# Altium PCB uADC_PCBPcbDoc.PcbDoc (part 2 of 2)
Units mm, origin at the board's own origin, x right, y up, seen from the top; angles counter-clockwise.
Board outline 125 x 63 mm, 4 copper layers (Top Layer, Layer 1, Layer 2, Bottom Layer), stack 2.084 mm thick; 242 components, 92 nets, 541 pads, 139 vias.
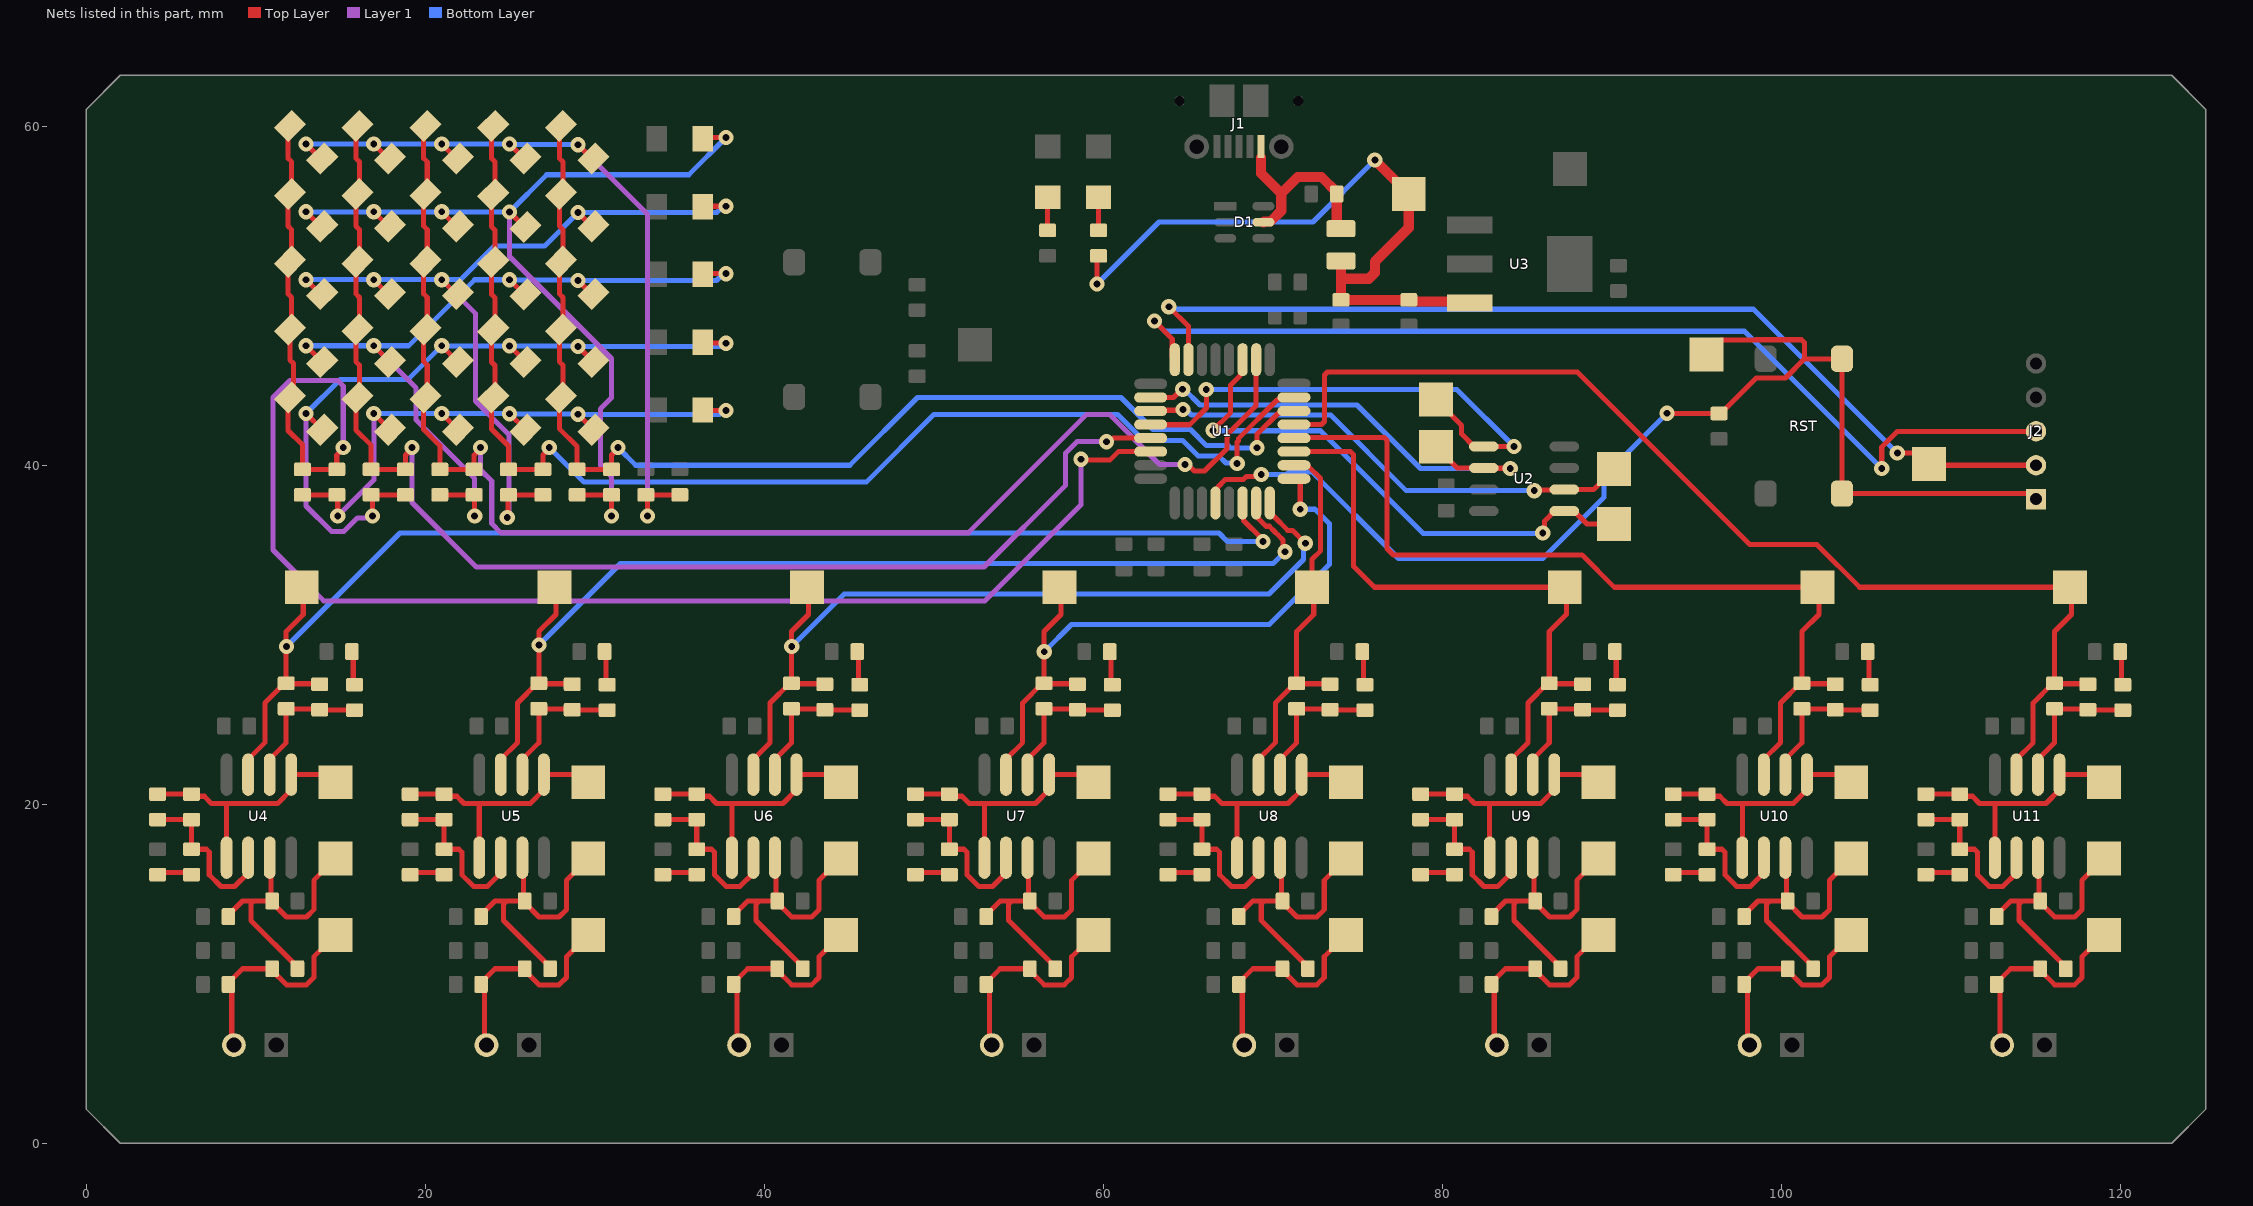
[diagram p4: the nets of this part, all layers, seen from the top]

## Via types
v1: diameter 0.9, hole 0.4, Top Layer to Bottom Layer, tented both sides, 110 vias
v2: diameter 0.6/0.6/0.6/0.6 (per signal layer), hole 0.4, Top Layer to Bottom Layer, 24 vias
v3: diameter 6, hole 3.2, Top Layer to Bottom Layer, 4 vias
v4: diameter 0.9, hole 0.4, Top Layer to Bottom Layer, 1 vias

## Nets (pads, with @x,y where several pads share a name; then routed paths per layer and width w, separated by ;. In a path a pad name is that pad's centre, name@x,y a point inside that pad or via, vN(x,y) a via of type N, cw(c..) or ccw(c..) an arc to the next point about the centre after c; other vN are vias at no path point) (continued)
LD_1: C74.2 D24.2 D25.2 D26.2 D27.2 D28.2 R64.1 U1.14 | length 69
  Top Layer w0.3: D25.2@28,48 27.894,47.894 27.894,46.106 28.106,45.894 28.106,44.106 D24.2@28,44 27.894,43.894 27.894,42.156 28.949,41.101 R64.1@28.949,39.75 C74.2@30.974,39.75 30.974,40.597 v1@31.356,40.978 ; D26.2@28,52 27.894,51.894 27.894,50.106 28.106,49.894 D25.2@28.106,48.106 ; D27.2@28,56 27.894,55.894 27.894,54.106 28.106,53.894 D26.2@28.106,52.106 ; D28.2@28,60 27.894,59.894 27.894,58.106 28.106,57.894 D27.2@28.106,56.106 ; v1(69.05,41.025) 69.054,41.029 69.054,41.824 70.281,43.05 70.319,43.05 70.469,43.2 U1.14@71.225,43.2
  Bottom Layer w0.3: v1(31.356,41.05) 32.406,40 45.025,40 49.025,44 61.025,44 62.919,42.106 65.122,42.106 66.074,41.155 67.359,41.155 67.488,41.025 v1(69.05,41.025)
LD_2: C73.2 D19.2 D20.2 D21.2 D22.2 D23.2 R63.1 U1.15 | length 74.3
  Top Layer w0.3: D19.2@24,44 23.894,43.894 23.894,42.13 24.897,41.127 R63.1@24.897,39.75 C73.2@26.923,39.75 26.923,40.597 v1@27.304,40.978 ; D20.2@24,47.989 23.894,47.883 23.894,46.095 24.106,45.883 D19.2@24.106,44.095 ; D21.2@24,51.977 23.894,51.871 23.894,50.083 24.106,49.871 D20.2@24.106,48.083 ; D22.2@24,55.966 23.894,55.86 23.894,54.072 24.106,53.86 D21.2@24.106,52.072 ; D23.2@24,60 23.894,59.894 23.894,58.106 24.106,57.894 D22.2@24.106,56.106 ; v1(67.875,40.1) 67.875,41.361 67.947,41.433 67.947,41.565 70.232,43.85 70.319,43.85 70.469,44 U1.15@71.225,44
  Bottom Layer w0.3: v1(27.304,41.05) 29.354,39 46,39 50,43 60.825,43 62.357,41.468 64.648,41.468 65.562,40.555 66.795,40.555 67.226,40.123 67.852,40.123 v1(67.875,40.1)
LD_3: C72.2 D14.2 D15.2 D16.2 D17.2 D18.2 R62.1 U1.18 | length 83.8
  Top Layer w0.3: D14.2@20,44 19.894,43.894 19.894,42.105 20.846,41.153 R62.1@20.846,39.75 ; D15.2@20,48 19.894,47.894 19.894,46.106 20.106,45.894 D14.2@20.106,44.106 ; D16.2@20,52 19.894,51.894 19.894,50.106 20.106,49.894 D15.2@20.106,48.106 ; D17.2@20,56 19.894,55.894 19.894,54.106 20.106,53.894 D16.2@20.106,52.106 ; D18.2@20,60 19.894,59.894 19.894,58.106 20.106,57.894 D17.2@20.106,56.106 ; R62.1@20.505,40 20.755,39.75 R62.1@20.846,39.75 ; v1@23.253,40.978 22.872,40.597 C72.2@22.872,39.75 R62.1@20.846,39.75 ; v1(64.804,40.039) 64.967,40.039 65.351,39.655 65.955,39.655 67.275,40.975 67.275,41.61 67.347,41.682 67.347,41.874 69,43.528 U1.18@69,46.225
  Layer 1 w0.3: v1(23.253,41.05) 23.253,39.717 23.907,39.063 23.907,36.556 24.447,36.016 52.016,36.016 59,43 60.341,43 63.302,40.039 v1(64.804,40.039)
LD_4: C71.2 D9.2 D10.2 D11.2 D12.2 D13.2 R61.1 U1.29 | length 77.2
  Top Layer w0.3: D9.2@16,44 15.894,43.894 15.894,42.079 16.794,41.179 R61.1@16.794,39.75 ; D10.2@16,48 15.894,47.894 15.894,46.106 16.106,45.894 D9.2@16.106,44.106 ; D11.2@16,52 15.894,51.894 15.894,50.106 16.106,49.894 D10.2@16.106,48.106 ; D12.2@16,56 15.894,55.894 15.894,54.106 16.106,53.894 D11.2@16.106,52.106 ; D13.2@16,60 15.894,59.894 15.894,58.106 16.106,57.894 D12.2@16.106,56.106 ; R61.1@16.505,40 16.755,39.75 R61.1@16.794,39.75 ; v1@19.201,40.978 18.82,40.597 C71.2@18.82,39.75 R61.1@16.794,39.75 ; v1(60.17,41.388) 60.332,41.388 60.544,41.6 U1.29@62.775,41.6
  Layer 1 w0.3: v1(19.201,41.05) 19.201,37.799 23,34 52.945,34 57.763,38.818 57.763,40.725 58.43,41.391 60.167,41.391 v1(60.17,41.388)
LD_5: C70.2 D4.2 D5.2 D6.2 D7.2 D8.2 R60.1 U1.30 | length 99.8
  Top Layer w0.3: D4.2@12,44 11.894,43.894 11.894,42.053 12.743,41.204 R60.1@12.743,39.75 C70.2@14.769,39.75 14.769,40.597 15.15,40.978 v1(15.15,41.05) ; D6.2@12,52 11.894,51.894 11.894,50.106 12.106,49.894 12.106,48.106 D5.2@12,48 12,46.212 12.212,46 D4.2@12.212,44.212 ; D7.2@12,56 11.894,55.894 11.894,54.106 12.106,53.894 D6.2@12.106,52.106 ; D8.2@12,60 11.894,59.894 11.894,58.106 12.106,57.894 D7.2@12.106,56.106 ; v1(58.663,40.352) 58.717,40.298 60.367,40.298 60.869,40.8 U1.30@62.775,40.8
  Layer 1 w0.3: v1(15.15,41.05) 15.15,44.674 14.824,45 12,45 11,44 11,35 14,32 53,32 58.663,37.663 v1(58.663,40.352)
MEM_CS: CS.1 U1.19 U2.1 | length 32.3
  Top Layer w0.3: v1(66.447,42.055) 67.493,43.101 67.493,44.724 68.05,45.281 68.05,45.319 68.2,45.469 U1.19@68.2,46.225 ; v1(85.9,36) 86.015,36.115 86.015,36.71 86.6,37.295 U2.1@87.175,37.295 87.75,37.295 88.51,36.535 CS.1@90.1,36.535
  Bottom Layer w0.3: v1(66.447,42.055) 66.469,42.033 72.792,42.033 78.853,35.973 85.873,35.973 v1(85.9,36)
MIC0: C18.1 R7.1 TP13.1@12.7,32.8 U1.6 U4.7 | length 77.6
  Top Layer w0.3: U4.7@9.543,21.75 9.543,22.65 10.527,23.635 10.527,25.979 11.685,27.137 C18.1@11.785,27.137 ; TP13.1@12.7,32.8 12.793,32.707 12.793,31.193 11.785,30.186 C18.1@11.785,27.137 ; R7.1@13.756,27.083 13.729,27.11 11.812,27.11 C18.1@11.785,27.137 ; U1.6@68.2,37.775 68.257,37.718 68.257,36.743 v1@69.3,35.7
  Bottom Layer w0.3: v1(11.8,29.3) 18.5,36 66.8,36 67.3,35.5 v1(69.4,35.5)
MIC1: C25.1 R14.1 TP17.1 U1.7 U5.7 | length 64.5
  Top Layer w0.3: U5.7@24.443,21.75 24.443,22.65 25.427,23.635 25.427,25.979 26.585,27.137 C25.1@26.685,27.137 ; TP17.1@27.6,32.8 27.693,32.707 27.693,31.193 26.685,30.186 C25.1@26.685,27.137 ; R14.1@28.656,27.083 28.629,27.11 26.712,27.11 C25.1@26.685,27.137 ; U1.7@69,37.775 69,37.019 69.15,36.869 69.15,36.831 69.581,36.4 69.773,36.4 70.086,36.086 70.3,35.873 70.585,35.588 70.585,35.015 v1(70.7,34.9)
  Bottom Layer w0.3: v1(26.7,29.4) 31.5,34.2 70,34.2 v1(70.7,34.9)
MIC2: C32.1 R21.1 TP21.1 U1.8 U6.7 | length 51.2
  Top Layer w0.3: U6.7@39.343,21.75 39.343,22.65 40.327,23.635 40.327,25.979 41.485,27.137 C32.1@41.585,27.137 ; TP21.1@42.5,32.8 42.593,32.707 42.593,31.193 41.585,30.186 C32.1@41.585,27.137 ; R21.1@43.556,27.083 43.529,27.11 41.612,27.11 C32.1@41.585,27.137 ; U1.8@69.8,37.775 69.8,37.181 69.981,37 70.021,37 70.861,36.161 71.139,36.161 v1(71.9,35.4)
  Bottom Layer w0.3: v1(41.6,29.3) 44.7,32.4 69.751,32.4 71.785,34.434 71.785,35.285 v1(71.9,35.4)
MIC3: C39.1 R28.1 TP25.1 U1.9 U7.7 | length 40
  Top Layer w0.3: U7.7@54.243,21.75 54.243,22.65 55.227,23.635 55.227,25.979 56.385,27.137 C39.1@56.485,27.137 ; TP25.1@57.4,32.8 57.493,32.707 57.493,31.193 56.485,30.186 C39.1@56.485,27.137 ; R28.1@58.456,27.083 58.429,27.11 56.512,27.11 C39.1@56.485,27.137 ; U1.9@71.225,39.2 71.461,39.2 71.6,39.061 v1(71.6,37.4)
  Bottom Layer w0.3: v1(56.5,29) 58.1,30.6 69.768,30.6 73.32,34.151 73.32,36.546 72.466,37.4 v1(71.6,37.4)
MIC4: C46.1 R35.1 TP29.1 U1.10 U8.7 | length 23
  Top Layer w0.3: U8.7@69.143,21.75 69.143,22.65 70.127,23.635 70.127,25.979 71.285,27.137 C46.1@71.385,27.137 ; U1.10@71.225,40 71.282,39.943 72.077,39.943 72.8,39.219 72.8,34.961 72.3,34.461 TP29.1@72.3,32.8 72.393,32.707 72.393,31.193 71.385,30.186 C46.1@71.385,27.137 ; R35.1@73.356,27.083 73.329,27.11 71.412,27.11 C46.1@71.385,27.137
MIC5: C53.1 R42.1 TP33.1 U1.11 U9.7 | length 37.6
  Top Layer w0.3: U1.11@71.225,40.8 74.566,40.8 74.741,40.624 74.741,34.034 75.976,32.8 TP33.1@87.2,32.8 87.293,32.707 87.293,31.193 86.285,30.186 C53.1@86.285,27.137 ; U9.7@84.042,21.75 84.042,22.65 85.027,23.635 85.027,25.979 86.185,27.137 C53.1@86.285,27.137 ; R42.1@88.256,27.083 88.229,27.11 86.312,27.11 C53.1@86.285,27.137
MIC6: C60.1 R49.1 TP37.1 U1.12 U10.7 | length 52.8
  Top Layer w0.3: U1.12@71.225,41.6 71.267,41.642 76.541,41.642 76.717,41.466 76.717,35.083 77.1,34.7 88.225,34.7 90.125,32.8 TP37.1@102.1,32.8 102.193,32.707 102.193,31.193 101.185,30.186 C60.1@101.185,27.137 ; U10.7@98.942,21.75 98.942,22.65 99.927,23.635 99.927,25.979 101.085,27.137 C60.1@101.185,27.137 ; R49.1@103.156,27.083 103.129,27.11 101.212,27.11 C60.1@101.185,27.137
MIC7: C67.1 R56.1 TP41.1 U1.13 U11.7 | length 68.4
  Top Layer w0.3: U1.13@71.225,42.4 72.854,42.4 73.03,42.576 73.03,45.324 73.206,45.5 87.938,45.5 98.126,35.312 102.083,35.312 104.595,32.8 TP41.1@117,32.8 117.093,32.707 117.093,31.193 116.085,30.186 C67.1@116.085,27.137 ; U11.7@113.842,21.75 113.842,22.65 114.827,23.635 114.827,25.979 115.985,27.137 C67.1@116.085,27.137 ; R56.1@118.056,27.083 118.029,27.11 116.112,27.11 C67.1@116.085,27.137
MISO: MISO.1 U1.27 U2.2 | length 29.9
  Top Layer w0.3: U1.27@62.775,43.2 62.818,43.243 64.644,43.243 v1(64.686,43.285) ; v1(85.4,38.5) 85.432,38.532 87.143,38.532 U2.2@87.175,38.565 87.182,38.572 88.904,38.572 MISO.1@90.1,39.768
  Bottom Layer w0.3: v1(64.686,43.285) 64.849,43.285 65.179,42.955 73.395,42.955 77.85,38.5 v1(85.4,38.5)
MOSI: MOSI.1 U1.28 U2.5 | length 30.4
  Top Layer w0.3: U1.28@62.79,42.385 65.076,42.385 66.071,43.38 v1@66.071,44.446 ; MOSI.1@79.6,43.87 81.121,42.349 81.121,41.834 81.85,41.105 U2.5@82.425,41.105 82.427,41.102 84.197,41.102 v1(84.2,41.1)
  Bottom Layer w0.3: v1(66.051,44.467) 80.833,44.467 v1(84.2,41.1)
Net3_3V_2: 3_3V.2 R2.1 | length 1.9
  Top Layer w0.3: R2.1@56.7,53.85 3_3V.2@56.7,55.8
Net_1: C17.1 R5.1 TP13.1@14.7,21.3 U4.1 U4.5 | length 15.4
  Top Layer w0.3: R5.1@4.2,20.6 C17.1@6.2,20.6 6.329,20.471 6.949,20.471 7.371,20.05 8.222,20.05 ; U4.1@8.273,16.85 8.273,20 8.222,20.05 ; TP13.1@14.7,21.3 14.25,21.75 U4.5@12.083,21.75 12.083,20.85 11.282,20.05 8.222,20.05
NetC14_1: C14.1 R6.2 | length 2
  Top Layer w0.3: C14.1@15.662,29 15.739,28.923 15.739,27.13 R6.2@15.816,27.053
NetC15_1: C15.1 R4.2 | length 2.1
  Top Layer w0.3: C15.1@4.2,15.85 4.325,15.975 6.075,15.975 R4.2@6.2,16.1
NetC17_2: C17.2 R4.1 R5.2 U4.2 | length 9.9
  Top Layer w0.3: R5.2@4.2,19.1 C17.2@6.2,19.1 6.2,17.6 R4.1@6.3,17.6 ; R4.1@6.2,17.35 7.07,17.35 7.246,17.174 7.246,15.846 7.941,15.15 8.743,15.15 9.543,15.95 U4.2@9.543,16.85
NetC18_2: C18.2 R6.1 R7.2 U4.6 | length 8.4
  Top Layer w0.3: U4.6@10.813,21.75 10.813,22.65 11.785,23.623 C18.2@11.785,25.637 11.812,25.61 13.729,25.61 R7.2@13.756,25.583 13.771,25.568 15.801,25.568 R6.1@15.816,25.553
NetC19_1: C19.1 R9.1 R10.2 TP11.1 U4.3 | length 17.5
  Top Layer w0.3: R9.1@8.378,13.375 8.378,13.475 9.203,14.3 9.876,14.3 ; U4.3@10.813,16.85 10.881,16.781 10.881,14.369 R10.2@10.95,14.3 ; C19.1@12.45,10.3 12.45,10.4 9.7,13.15 9.7,14.124 9.876,14.3 ; TP11.1@14.7,16.8 13.414,15.514 13.414,13.786 12.978,13.35 11.8,13.35 10.95,14.2 R10.2@10.95,14.3 ; 9.876,14.3 R10.2@10.95,14.3
NetC19_2: C19.2 CH0.2 R8.1 TP10.1 | length 13
  Top Layer w0.3: TP10.1@14.7,12.3 13.414,11.014 13.414,9.786 12.978,9.35 11.8,9.35 10.95,10.2 C19.2@10.95,10.3 9.203,10.3 8.378,9.475 R8.1@8.378,9.375 8.575,9.177 CH0.2@8.575,5.925 ; CH0.2@8.575,5.925 CH0.2@8.7,5.8 CH0.2@8.575,5.925
NetC21_1: C21.1 R13.2 | length 2
  Top Layer w0.3: C21.1@30.562,29 30.639,28.923 30.639,27.13 R13.2@30.716,27.053
NetC22_1: C22.1 R11.2 | length 2.1
  Top Layer w0.3: C22.1@19.1,15.85 19.225,15.975 20.975,15.975 R11.2@21.1,16.1
NetC24_1: C24.1 R12.1 TP16.1 U5.1 U5.5 | length 15.4
  Top Layer w0.3: R12.1@19.1,20.6 C24.1@21.1,20.6 21.229,20.471 21.849,20.471 22.271,20.05 23.122,20.05 ; U5.1@23.173,16.85 23.173,20 23.122,20.05 ; TP16.1@29.6,21.3 29.15,21.75 U5.5@26.983,21.75 26.983,20.85 26.182,20.05 23.122,20.05
NetC24_2: C24.2 R11.1 R12.2 U5.2 | length 9.9
  Top Layer w0.3: R12.2@19.1,19.1 C24.2@21.1,19.1 21.1,17.6 R11.1@21.2,17.6 ; R11.1@21.1,17.35 21.97,17.35 22.146,17.174 22.146,15.846 22.841,15.15 23.643,15.15 24.443,15.95 U5.2@24.443,16.85
NetC25_2: C25.2 R13.1 R14.2 U5.6 | length 8.4
  Top Layer w0.3: U5.6@25.713,21.75 25.713,22.65 26.685,23.623 C25.2@26.685,25.637 26.712,25.61 28.629,25.61 R14.2@28.656,25.583 28.671,25.568 30.701,25.568 R13.1@30.716,25.553
NetC26_1: C26.1 R16.1 R17.2 TP15.1 U5.3 | length 17.5
  Top Layer w0.3: R16.1@23.278,13.375 23.278,13.475 24.103,14.3 24.776,14.3 ; U5.3@25.713,16.85 25.781,16.781 25.781,14.369 R17.2@25.85,14.3 ; C26.1@27.35,10.3 27.35,10.4 24.6,13.15 24.6,14.124 24.776,14.3 ; TP15.1@29.6,16.8 28.314,15.514 28.314,13.786 27.878,13.35 26.7,13.35 25.85,14.2 R17.2@25.85,14.3 ; 24.776,14.3 R17.2@25.85,14.3
NetC26_2: C26.2 CH1.2 R15.1 TP14.1 | length 13
  Top Layer w0.3: TP14.1@29.6,12.3 28.314,11.014 28.314,9.786 27.878,9.35 26.7,9.35 25.85,10.2 C26.2@25.85,10.3 24.103,10.3 23.278,9.475 R15.1@23.278,9.375 23.475,9.177 CH1.2@23.475,5.925 ; CH1.2@23.475,5.925 CH1.2@23.6,5.8 CH1.2@23.475,5.925
NetC28_1: C28.1 R20.2 | length 2
  Top Layer w0.3: C28.1@45.462,29 45.539,28.923 45.539,27.13 R20.2@45.616,27.053
NetC29_1: C29.1 R18.2 | length 2.1
  Top Layer w0.3: C29.1@34,15.85 34.125,15.975 35.875,15.975 R18.2@36,16.1
NetC31_1: C31.1 R19.1 TP20.1 U6.1 U6.5 | length 15.4
  Top Layer w0.3: R19.1@34,20.6 C31.1@36,20.6 36.129,20.471 36.749,20.471 37.171,20.05 38.022,20.05 ; U6.1@38.073,16.85 38.073,20 38.022,20.05 ; TP20.1@44.5,21.3 44.05,21.75 U6.5@41.883,21.75 41.883,20.85 41.082,20.05 38.022,20.05
NetC31_2: C31.2 R18.1 R19.2 U6.2 | length 9.9
  Top Layer w0.3: R19.2@34,19.1 C31.2@36,19.1 36,17.6 R18.1@36.1,17.6 ; R18.1@36,17.35 36.87,17.35 37.046,17.174 37.046,15.846 37.741,15.15 38.543,15.15 39.343,15.95 U6.2@39.343,16.85
NetC32_2: C32.2 R20.1 R21.2 U6.6 | length 8.4
  Top Layer w0.3: U6.6@40.613,21.75 40.613,22.65 41.585,23.623 C32.2@41.585,25.637 41.612,25.61 43.529,25.61 R21.2@43.556,25.583 43.571,25.568 45.601,25.568 R20.1@45.616,25.553
NetC33_1: C33.1 R23.1 R24.2 TP19.1 U6.3 | length 17.5
  Top Layer w0.3: R23.1@38.178,13.375 38.178,13.475 39.003,14.3 39.676,14.3 ; U6.3@40.613,16.85 40.681,16.781 40.681,14.369 R24.2@40.75,14.3 ; C33.1@42.25,10.3 42.25,10.4 39.5,13.15 39.5,14.124 39.676,14.3 ; TP19.1@44.5,16.8 43.214,15.514 43.214,13.786 42.778,13.35 41.6,13.35 40.75,14.2 R24.2@40.75,14.3 ; 39.676,14.3 R24.2@40.75,14.3
NetC33_2: C33.2 CH2.2 R22.1 TP18.1 | length 13
  Top Layer w0.3: TP18.1@44.5,12.3 43.214,11.014 43.214,9.786 42.778,9.35 41.6,9.35 40.75,10.2 C33.2@40.75,10.3 39.003,10.3 38.178,9.475 R22.1@38.178,9.375 38.375,9.177 CH2.2@38.375,5.925 ; CH2.2@38.375,5.925 CH2.2@38.5,5.8 CH2.2@38.375,5.925
NetC35_1: C35.1 R27.2 | length 2
  Top Layer w0.3: C35.1@60.362,29 60.439,28.923 60.439,27.13 R27.2@60.516,27.053
NetC36_1: C36.1 R25.2 | length 2.1
  Top Layer w0.3: C36.1@48.9,15.85 49.025,15.975 50.775,15.975 R25.2@50.9,16.1
NetC38_1: C38.1 R26.1 TP24.1 U7.1 U7.5 | length 15.4
  Top Layer w0.3: R26.1@48.9,20.6 C38.1@50.9,20.6 51.029,20.471 51.649,20.471 52.071,20.05 52.922,20.05 ; U7.1@52.973,16.85 52.973,20 52.922,20.05 ; TP24.1@59.4,21.3 58.95,21.75 U7.5@56.783,21.75 56.783,20.85 55.982,20.05 52.922,20.05
NetC38_2: C38.2 R25.1 R26.2 U7.2 | length 9.9
  Top Layer w0.3: R26.2@48.9,19.1 C38.2@50.9,19.1 50.9,17.6 R25.1@51,17.6 ; R25.1@50.9,17.35 51.77,17.35 51.946,17.174 51.946,15.846 52.641,15.15 53.443,15.15 54.243,15.95 U7.2@54.243,16.85
NetC39_2: C39.2 R27.1 R28.2 U7.6 | length 8.4
  Top Layer w0.3: U7.6@55.513,21.75 55.513,22.65 56.485,23.623 C39.2@56.485,25.637 56.512,25.61 58.429,25.61 R28.2@58.456,25.583 58.471,25.568 60.501,25.568 R27.1@60.516,25.553
NetC40_1: C40.1 R30.1 R31.2 TP23.1 U7.3 | length 17.5
  Top Layer w0.3: R30.1@53.078,13.375 53.078,13.475 53.903,14.3 54.576,14.3 ; U7.3@55.513,16.85 55.581,16.781 55.581,14.369 R31.2@55.65,14.3 ; C40.1@57.15,10.3 57.15,10.4 54.4,13.15 54.4,14.124 54.576,14.3 ; TP23.1@59.4,16.8 58.114,15.514 58.114,13.786 57.678,13.35 56.5,13.35 55.65,14.2 R31.2@55.65,14.3 ; 54.576,14.3 R31.2@55.65,14.3
NetC40_2: C40.2 CH3.2 R29.1 TP22.1 | length 13
  Top Layer w0.3: TP22.1@59.4,12.3 58.114,11.014 58.114,9.786 57.678,9.35 56.5,9.35 55.65,10.2 C40.2@55.65,10.3 53.903,10.3 53.078,9.475 R29.1@53.078,9.375 53.275,9.177 CH3.2@53.275,5.925 ; CH3.2@53.275,5.925 CH3.2@53.4,5.8 CH3.2@53.275,5.925
NetC42_1: C42.1 R34.2 | length 2
  Top Layer w0.3: C42.1@75.262,29 75.339,28.923 75.339,27.13 R34.2@75.416,27.053
NetC43_1: C43.1 R32.2 | length 2.1
  Top Layer w0.3: C43.1@63.8,15.85 63.925,15.975 65.675,15.975 R32.2@65.8,16.1
NetC45_1: C45.1 R33.1 TP28.1 U8.1 U8.5 | length 15.4
  Top Layer w0.3: R33.1@63.8,20.6 C45.1@65.8,20.6 65.929,20.471 66.549,20.471 66.971,20.05 67.822,20.05 ; U8.1@67.873,16.85 67.873,20 67.822,20.05 ; TP28.1@74.3,21.3 73.85,21.75 U8.5@71.683,21.75 71.683,20.85 70.882,20.05 67.822,20.05
NetC45_2: C45.2 R32.1 R33.2 U8.2 | length 9.9
  Top Layer w0.3: R33.2@63.8,19.1 C45.2@65.8,19.1 65.8,17.6 R32.1@65.9,17.6 ; R32.1@65.8,17.35 66.67,17.35 66.846,17.174 66.846,15.846 67.541,15.15 68.342,15.15 69.143,15.95 U8.2@69.143,16.85
NetC46_2: C46.2 R34.1 R35.2 U8.6 | length 8.4
  Top Layer w0.3: U8.6@70.413,21.75 70.413,22.65 71.385,23.623 C46.2@71.385,25.637 71.412,25.61 73.329,25.61 R35.2@73.356,25.583 73.371,25.568 75.401,25.568 R34.1@75.416,25.553
NetC47_1: C47.1 R37.1 R38.2 TP27.1 U8.3 | length 17.5
  Top Layer w0.3: R37.1@67.978,13.375 67.978,13.475 68.803,14.3 69.476,14.3 ; U8.3@70.413,16.85 70.481,16.781 70.481,14.369 R38.2@70.55,14.3 ; C47.1@72.05,10.3 72.05,10.4 69.3,13.15 69.3,14.124 69.476,14.3 ; TP27.1@74.3,16.8 73.014,15.514 73.014,13.786 72.578,13.35 71.4,13.35 70.55,14.2 R38.2@70.55,14.3 ; 69.476,14.3 R38.2@70.55,14.3
NetC47_2: C47.2 CH4.2 R36.1 TP26.1 | length 13
  Top Layer w0.3: TP26.1@74.3,12.3 73.014,11.014 73.014,9.786 72.578,9.35 71.4,9.35 70.55,10.2 C47.2@70.55,10.3 68.803,10.3 67.978,9.475 R36.1@67.978,9.375 68.175,9.177 CH4.2@68.175,5.925 ; CH4.2@68.175,5.925 CH4.2@68.3,5.8 CH4.2@68.175,5.925
NetC49_1: C49.1 R41.2 | length 2
  Top Layer w0.3: C49.1@90.162,29 90.239,28.923 90.239,27.13 R41.2@90.316,27.053
NetC50_1: C50.1 R39.2 | length 2.1
  Top Layer w0.3: C50.1@78.7,15.85 78.825,15.975 80.575,15.975 R39.2@80.7,16.1
NetC52_1: C52.1 R40.1 TP32.1 U9.1 U9.5 | length 15.4
  Top Layer w0.3: R40.1@78.7,20.6 C52.1@80.7,20.6 80.829,20.471 81.449,20.471 81.871,20.05 82.722,20.05 ; U9.1@82.772,16.85 82.772,20 82.722,20.05 ; TP32.1@89.2,21.3 88.75,21.75 U9.5@86.582,21.75 86.582,20.85 85.782,20.05 82.722,20.05
NetC52_2: C52.2 R39.1 R40.2 U9.2 | length 9.9
  Top Layer w0.3: R40.2@78.7,19.1 C52.2@80.7,19.1 80.7,17.6 R39.1@80.8,17.6 ; R39.1@80.7,17.35 81.57,17.35 81.746,17.174 81.746,15.846 82.441,15.15 83.242,15.15 84.042,15.95 U9.2@84.042,16.85
NetC53_2: C53.2 R41.1 R42.2 U9.6 | length 8.4
  Top Layer w0.3: U9.6@85.312,21.75 85.312,22.65 86.285,23.623 C53.2@86.285,25.637 86.312,25.61 88.229,25.61 R42.2@88.256,25.583 88.271,25.568 90.301,25.568 R41.1@90.316,25.553
NetC54_1: C54.1 R44.1 R45.2 TP31.1 U9.3 | length 17.5
  Top Layer w0.3: R44.1@82.878,13.375 82.878,13.475 83.703,14.3 84.376,14.3 ; U9.3@85.312,16.85 85.381,16.781 85.381,14.369 R45.2@85.45,14.3 ; C54.1@86.95,10.3 86.95,10.4 84.2,13.15 84.2,14.124 84.376,14.3 ; TP31.1@89.2,16.8 87.914,15.514 87.914,13.786 87.478,13.35 86.3,13.35 85.45,14.2 R45.2@85.45,14.3 ; 84.376,14.3 R45.2@85.45,14.3
NetC54_2: C54.2 CH5.2 R43.1 TP30.1 | length 13
  Top Layer w0.3: R43.1@82.878,9.475 83.703,10.3 C54.2@85.45,10.3 85.45,10.2 86.3,9.35 87.478,9.35 87.914,9.786 87.914,11.014 TP30.1@89.2,12.3 ; R43.1@83.075,9.177 R43.1@82.878,9.375 83.039,9.213 83.039,5.961 CH5.2@83.2,5.8
NetC56_1: C56.1 R48.2 | length 2
  Top Layer w0.3: C56.1@105.062,29 105.139,28.923 105.139,27.13 R48.2@105.216,27.053
NetC57_1: C57.1 R46.2 | length 2.1
  Top Layer w0.3: C57.1@93.6,15.85 93.725,15.975 95.475,15.975 R46.2@95.6,16.1
NetC59_1: C59.1 R47.1 TP36.1 U10.1 U10.5 | length 15.4
  Top Layer w0.3: R47.1@93.6,20.6 C59.1@95.6,20.6 95.729,20.471 96.349,20.471 96.771,20.05 97.622,20.05 ; U10.1@97.672,16.85 97.672,20 97.622,20.05 ; TP36.1@104.1,21.3 103.65,21.75 U10.5@101.482,21.75 101.482,20.85 100.682,20.05 97.622,20.05
NetC59_2: C59.2 R46.1 R47.2 U10.2 | length 9.9
  Top Layer w0.3: R47.2@93.6,19.1 C59.2@95.6,19.1 95.6,17.6 R46.1@95.7,17.6 ; R46.1@95.6,17.35 96.47,17.35 96.646,17.174 96.646,15.846 97.341,15.15 98.142,15.15 98.942,15.95 U10.2@98.942,16.85
NetC60_2: C60.2 R48.1 R49.2 U10.6 | length 8.4
  Top Layer w0.3: U10.6@100.212,21.75 100.212,22.65 101.185,23.623 C60.2@101.185,25.637 101.212,25.61 103.129,25.61 R49.2@103.156,25.583 103.171,25.568 105.201,25.568 R48.1@105.216,25.553
NetC61_1: C61.1 R51.1 R52.2 TP35.1 U10.3 | length 17.5
  Top Layer w0.3: R51.1@97.778,13.375 97.778,13.475 98.603,14.3 99.276,14.3 ; U10.3@100.212,16.85 100.281,16.781 100.281,14.369 R52.2@100.35,14.3 ; C61.1@101.85,10.3 101.85,10.4 99.1,13.15 99.1,14.124 99.276,14.3 ; TP35.1@104.1,16.8 102.814,15.514 102.814,13.786 102.378,13.35 101.2,13.35 100.35,14.2 R52.2@100.35,14.3 ; 99.276,14.3 R52.2@100.35,14.3
NetC61_2: C61.2 CH6.2 R50.1 TP34.1 | length 13
  Top Layer w0.3: TP34.1@104.1,12.3 102.814,11.014 102.814,9.786 102.378,9.35 101.2,9.35 100.35,10.2 C61.2@100.35,10.3 98.603,10.3 97.778,9.475 R50.1@97.778,9.375 97.975,9.177 CH6.2@97.975,5.925 ; CH6.2@97.975,5.925 CH6.2@98.1,5.8 CH6.2@97.975,5.925
NetC63_1: C63.1 R55.2 | length 2
  Top Layer w0.3: C63.1@119.962,29 120.039,28.923 120.039,27.13 R55.2@120.116,27.053
NetC64_1: C64.1 R53.2 | length 2.1
  Top Layer w0.3: C64.1@108.5,15.85 108.625,15.975 110.375,15.975 R53.2@110.5,16.1
NetC66_1: C66.1 R54.1 TP40.1 U11.1 U11.5 | length 15.4
  Top Layer w0.3: R54.1@108.5,20.6 C66.1@110.5,20.6 110.629,20.471 111.249,20.471 111.671,20.05 112.522,20.05 ; U11.1@112.572,16.85 112.572,20 112.522,20.05 ; TP40.1@119,21.3 118.55,21.75 U11.5@116.382,21.75 116.382,20.85 115.582,20.05 112.522,20.05
NetC66_2: C66.2 R53.1 R54.2 U11.2 | length 9.9
  Top Layer w0.3: R54.2@108.5,19.1 C66.2@110.5,19.1 110.5,17.6 R53.1@110.6,17.6 ; R53.1@110.5,17.35 111.37,17.35 111.546,17.174 111.546,15.846 112.241,15.15 113.042,15.15 113.842,15.95 U11.2@113.842,16.85
NetC67_2: C67.2 R55.1 R56.2 U11.6 | length 8.4
  Top Layer w0.3: U11.6@115.112,21.75 115.112,22.65 116.085,23.623 C67.2@116.085,25.637 116.112,25.61 118.029,25.61 R56.2@118.056,25.583 118.071,25.568 120.101,25.568 R55.1@120.116,25.553
NetC68_1: C68.1 R58.1 R59.2 TP39.1 U11.3 | length 17.5
  Top Layer w0.3: R58.1@112.678,13.375 112.678,13.475 113.503,14.3 114.176,14.3 ; U11.3@115.112,16.85 115.181,16.781 115.181,14.369 R59.2@115.25,14.3 ; C68.1@116.75,10.3 116.75,10.4 114,13.15 114,14.124 114.176,14.3 ; TP39.1@119,16.8 117.714,15.514 117.714,13.786 117.278,13.35 116.1,13.35 115.25,14.2 R59.2@115.25,14.3 ; 114.176,14.3 R59.2@115.25,14.3
NetC68_2: C68.2 CH7.2 R57.1 TP38.1 | length 13
  Top Layer w0.3: TP38.1@119,12.3 117.714,11.014 117.714,9.786 117.278,9.35 116.1,9.35 115.25,10.2 C68.2@115.25,10.3 113.503,10.3 112.678,9.475 R57.1@112.678,9.375 112.875,9.177 CH7.2@112.875,5.925 ; CH7.2@112.875,5.925 CH7.2@113,5.8 CH7.2@112.875,5.925
NetC70_1: C70.1 D9.1 D14.1 D19.1 D24.1 D29.1 R60.2 | length 37.9
  Top Layer w0.3: R60.2@12.743,38.25 C70.1@14.769,38.25 ; v1@14.825,37.075 14.825,38.368 C70.1@14.882,38.425 ; v1(16.955,43.045) 17.809,42.191 D9.1@17.909,42.191 ; v1(20.955,43.045) D14.1@21.909,42.091 ; v1(24.96,43.04) D19.1@25.909,42.091 ; v1(29,43) D24.1@29.909,42.091 ; D29.1@36.325,43.282 36.382,43.225 v1@37.675,43.225
  Layer 1 w0.3: v1(14.825,37) 16.955,39.13 v1(16.955,43.045)
  Bottom Layer w0.3: v1(16.955,43.045) v1(20.955,43.045) 20.957,43.043 24.957,43.043 v1(24.96,43.04) 24.98,43.02 28.98,43.02 v1(29,43) 37.338,43 37.563,43.225 v1(37.725,43.225)
NetC71_1: C71.1 D4.1 D15.1 D20.1 D25.1 D30.1 R61.2 | length 47
  Top Layer w0.3: v1(12.955,43.045) D4.1@13.909,42.091 ; R61.2@16.794,38.25 C71.1@18.82,38.25 ; v1@16.875,37.125 16.875,38.418 R61.2@16.932,38.475 ; v1(20.955,47.045) D15.1@21.909,46.091 ; v1(24.96,47.04) D20.1@25.909,46.091 ; v1(29,47) D25.1@29.909,46.091 ; D30.1@36.35,47.257 36.407,47.2 v1@37.7,47.2
  Layer 1 w0.3: v1(12.955,43.045) 12.955,37.598 14.452,36.1 15.198,36.1 15.983,36.885 16.76,36.885 v1(16.875,37)
  Bottom Layer w0.3: v1(12.955,43.045) 14.955,45.045 18.955,45.045 v1(20.955,47.045) 20.957,47.043 24.957,47.043 v1(24.96,47.04) 24.98,47.02 28.98,47.02 v1(29,47) 37.363,47 37.563,47.2 v1(37.725,47.2)
NetC72_1: C72.1 D5.1 D10.1 D21.1 D26.1 D31.1 R62.2 | length 49.1
  Top Layer w0.3: v1(12.955,47.045) D5.1@13.909,46.091 ; v1(16.955,47.045) 17.809,46.191 D10.1@17.909,46.191 ; R62.2@20.846,38.25 C72.1@22.872,38.25 ; v1(22.9,37) 22.9,38.293 C72.1@22.957,38.35 ; v1(24.96,50.94) D21.1@25.909,49.991 ; v1(29,50.9) D26.1@29.909,49.991 ; D31.1@36.35,51.357 36.407,51.3 v1@37.7,51.3
  Layer 1 w0.3: v1(16.955,47.045) 19.45,44.55 19.45,42.672 22.9,39.222 v1(22.9,37)
  Bottom Layer w0.3: v1(12.955,47.045) v1(16.955,47.045) 19.01,47.045 22.905,50.94 v1(24.96,50.94) 24.98,50.92 28.98,50.92 v1(29,50.9) 37.163,50.9 37.563,51.3 v1(37.725,51.3)
NetC73_1: C73.1 D6.1 D11.1 D16.1 D27.1 D32.1 R63.2 | length 52.4
  Top Layer w0.3: v1(12.955,50.945) D6.1@13.909,49.991 ; v1(16.955,50.945) 17.809,50.091 D11.1@17.909,50.091 ; v1(20.955,50.945) D16.1@21.909,49.991 ; v1(24.819,36.916) 24.858,36.955 24.858,38.183 R63.2@24.925,38.25 ; R63.2@24.897,38.25 R63.2@24.925,38.25 ; C73.1@26.923,38.25 R63.2@24.925,38.25 ; v1(29,54.9) D27.1@29.909,53.991 ; D32.1@36.375,55.332 36.432,55.275 v1(37.725,55.275)
  Layer 1 w0.3: v1(20.955,50.945) 22.94,48.96 22.94,43.787 24.925,41.802 24.925,37.022 v1(24.819,36.916)
  Bottom Layer w0.3: v1(12.955,50.945) v1(16.955,50.945) v1(20.955,50.945) 22.062,50.945 24.039,52.923 27.023,52.923 v1(29,54.9) 37.188,54.9 37.563,55.275 v1(37.725,55.275)
NetC74_1: C74.1 D7.1 D12.1 D17.1 D22.1 D33.1 R64.2 | length 57.7
  Top Layer w0.3: v1(12.955,54.945) D7.1@13.909,53.991 ; v1(16.955,54.945) 17.809,54.091 D12.1@17.909,54.091 ; v1(20.955,54.945) D17.1@21.909,53.991 ; v1(24.96,54.94) D22.1@25.909,53.991 ; R64.2@28.949,38.25 C74.1@30.974,38.25 ; v1@30.975,37.025 30.975,38.318 C74.1@31.032,38.375 ; D33.1@36.325,59.382 36.382,59.325 v1@37.675,59.325
  Layer 1 w0.3: v1(24.96,54.94) 24.96,52.313 30.975,46.298 30.975,43.973 30.325,43.323 30.325,39.974 30.975,39.324 v1(30.975,37)
  Bottom Layer w0.3: v1(12.955,54.945) v1(16.955,54.945) v1(20.955,54.945) 20.957,54.943 24.957,54.943 v1(24.96,54.94) 27.153,57.132 35.532,57.132 v1(37.725,59.325)
NetC75_1: C75.1 D8.1 D13.1 D18.1 D23.1 D28.1 R65.2 | length 49.7
  Top Layer w0.3: v1(12.955,58.945) D8.1@13.909,57.991 ; v1(16.955,58.945) 17.809,58.091 D13.1@17.909,58.091 ; v1(20.955,58.945) D18.1@21.909,57.991 ; v1(24.96,58.94) D23.1@25.909,57.991 ; v1(29,58.9) D28.1@29.909,57.991 ; R65.2@33,38.25 R65.2@33.1,38.25 ; v1@33.1,37.05 R65.2@33.1,38.25 ; R65.2@33.157,38.4 33.1,38.343 R65.2@33.1,38.25 ; C75.1@35,38.25 R65.2@33.1,38.25
  Layer 1 w0.3: v1(29,58.9) 33.1,54.8 v1(33.1,37)
  Bottom Layer w0.3: v1(12.955,58.945) v1(16.955,58.945) v1(20.955,58.945) 20.957,58.943 24.957,58.943 v1(24.96,58.94) 24.98,58.92 28.98,58.92 v1(29,58.9)
NetPower_2: Power.2 R3.1 | length 1.9
  Top Layer w0.3: R3.1@59.7,53.85 Power.2@59.7,55.8
NRST: C4.2 J2.1 NRST.1 RST.3 RST.4 U1.4 | length 72.6
  Top Layer w0.3: U1.4@66.6,37.775 66.6,38.531 66.75,38.681 66.75,38.719 67.196,39.165 68.249,39.165 68.425,39.341 69.187,39.341 v1(69.302,39.456) ; v1(93.233,43.069) 93.242,43.059 96.291,43.059 C4.2@96.3,43.05 96.4,43.05 98.5,45.15 100.219,45.15 101.344,46.275 ; NRST.1@95.549,46.536 96.399,47.386 98.432,47.386 98.445,47.4 101.168,47.4 101.344,47.224 101.344,46.275 ; J2.1@115,38 114.675,38.325 RST.3@103.55,38.325 RST.4@103.55,46.275 101.344,46.275
  Bottom Layer w0.3: v1(69.302,39.456) 70.794,39.456 70.954,39.616 72.284,39.616 77.4,34.5 85.9,34.5 89.509,38.109 89.509,39.345 v1(93.233,43.069)
SCK: SCK.1 U1.26 U2.6 | length 28.3
  Top Layer w0.3: U1.26@62.775,44 64.129,44 64.613,44.485 v1(64.661,44.485) ; SCK.1@79.6,41.087 80.852,39.835 U2.6@82.425,39.835 82.441,39.819 83.964,39.819 v1(83.981,39.802)
  Bottom Layer w0.3: v1(64.661,44.485) 64.76,44.485 65.69,43.555 74.945,43.555 78.698,39.802 v1(83.981,39.802)
SWDCLK: J2.3 U1.24 | length 60
  Top Layer w0.3: v1(63,48.5) 64.05,47.45 64.05,46.375 U1.24@64.2,46.225 ; v1(105.9,39.8) 105.9,41.073 106.827,42 J2.3@115,42
  Bottom Layer w0.3: v1(63,48.5) 63.6,47.9 97.8,47.9 v1(105.9,39.8)
SWDIO: J2.2 SWDIO.1 U1.23 | length 58.6
  Top Layer w0.3: v1(63.849,49.349) 65,48.197 U1.23@65,46.225 ; v1(106.819,40.719) 108.035,40.719 SWDIO.1@108.689,40.065 108.754,40 J2.2@115,40
  Bottom Layer w0.3: v1(63.849,49.349) 63.997,49.2 98.338,49.2 v1(106.819,40.719)
Vbus: C2.2 D1.5 FB1.1 J1.1 | length 11.3
  Top Layer w0.6: J1.1@69.285,58.136 69.285,57.216 70.476,56.026 ; D1.5@69.426,54.33 69.468,54.372 69.84,54.372 70.476,55.008 70.476,56.026 ; FB1.1@74,53.95 73.95,53.95 73.75,54.15 C2.2@73.75,56 73.75,56.1 72.85,57 71.45,57 70.476,56.026
Vin: C3.2 C12.2 FB1.2 R3.2 U3.3 Vin.1 | length 41.6
  Top Layer w0.3: v4(59.611,50.69) 59.611,52.261 R3.2@59.7,52.35
  Top Layer w0.6: FB1.2@74,52.05 74,50.9 ; v1(76,58) Vin.1@78,56 78,54 76,52 76,51.351 75.649,51 74.1,51 74,50.9 ; U3.3@81.593,49.567 81.502,49.658 78.092,49.658 C12.2@78,49.75 C3.2@74,49.75 74,50.9
  Bottom Layer w0.3: v4(59.611,50.69) 63.266,54.345 72.345,54.345 v1(76,58)
pads on no net: D1.3 D1.4 J1.4 U1.2 U1.3 U1.20 U2.3
copper on no net:
  other v2: 16.305,3.051 18.555,3.051 105.604,3.051 107.854,3.051 15.18,5 19.68,5 104.479,5 108.979,5 16.305,6.949 18.555,6.949 105.604,6.949 107.854,6.949 5.875,54.051 8.125,54.051 116.875,54.051 119.125,54.051 4.75,56 9.25,56 115.75,56 120.25,56 5.875,57.949 8.125,57.949 116.875,57.949 119.125,57.949
  other v3: 17.43,5 106.729,5 7,56 118,56

## Polygon pours and split planes (outlines as drawn)
GND on Top Layer "GND_L01_P004" (solid, pour order 4): 0,2 0,61 2,63 123,63 125,61 125,2 123,0 2,0
3V3 on Top Layer "3V3_L01_P000" (solid, pour order 0): 90,54 90,49 95,49 95,54
GND on Bottom Layer "GND_L04_P001" (solid, pour order 1): 0,2 0,61 2,63 123,63 125,61 125,2 123,0 2,0
3V3 on Layer 1 "3V3_L02_P002" (solid, pour order 2): 0,2 0,61 2,63 123,63 125,61 125,2 123,0 2,0
GND on Layer 2 "GND_L03_P003" (solid, pour order 3): 0,2 0,61 2,63 123,63 125,61 125,2 123,0 2,0

## Silkscreen, mask and mechanical layers (free items; w line width, h text height)
Top Overlay:
  region: 747 vertices and 2 holes, not listed, extent 2.827,37.709 6.654,41.523
  text "Daniel Niewiadomski" at 2.879,22.19 h3 r90
Board Outline:
  lines w0.254: 0,2 2,0 123,0 125,2 125,61 123,63 2,63 0,61 0,59 0,2
Top Assembly:
  drawing of 295 lines, arcs and shapes, not listed
  text "Layer" at -2.106,158.301 h1.51
  text "Name" at 8.186,158.301 h1.51
  text "Material" at 31.522,158.301 h1.51
  text "Thickness" at 53.102,158.301 h1.51
  text "Constant" at 69.414,158.301 h1.51
  text "Board Layer Stack" at 83.72,158.301 h1.51
  text "Top Overlay" at 8.186,155.29 h1.51
  text "Top Solder" at 8.186,152.279 h1.51
  text "Solder Resist" at 31.522,152.279 h1.51
  text "0.010mm" at 53.102,152.279 h1.51
  text "3.5" at 69.414,152.279 h1.51
  text "1" at -2.106,149.267 h1.51
  text "Top Layer" at 8.186,149.267 h1.51
  text "0.035mm" at 53.102,149.267 h1.51
  text "Dielectric 2" at 8.186,146.256 h1.51
  text "PP-006" at 31.522,146.256 h1.51
  text "0.092mm" at 53.102,146.256 h1.51
  text "4.1" at 69.414,146.256 h1.51
  text "2" at -2.106,143.245 h1.51
  text "Layer 1" at 8.186,143.245 h1.51
  text "CF-004" at 31.522,143.245 h1.51
  text "0.300mm" at 53.102,143.245 h1.51
  text "Dielectric 1" at 8.186,140.234 h1.51
  text "FR-4" at 31.522,140.234 h1.51
  text "1.230mm" at 53.102,140.234 h1.51
  text "4.8" at 69.414,140.234 h1.51
  text "3" at -2.106,137.223 h1.51
  text "Layer 2" at 8.186,137.223 h1.51
  text "CF-004" at 31.522,137.223 h1.51
  text "0.300mm" at 53.102,137.223 h1.51
  text "Dielectric 3" at 8.186,134.212 h1.51
  text "PP-006" at 31.522,134.212 h1.51
  text "0.092mm" at 53.102,134.212 h1.51
  text "4.1" at 69.414,134.212 h1.51
  text "4" at -2.106,131.201 h1.51
  text "Bottom Layer" at 8.186,131.201 h1.51
  text "0.035mm" at 53.102,131.201 h1.51
  text "Bottom Solder" at 8.186,128.189 h1.51
  text "Solder Resist" at 31.522,128.189 h1.51
  text "0.010mm" at 53.102,128.189 h1.51
  text "3.5" at 69.414,128.189 h1.51
  text "Bottom Overlay" at 8.186,125.178 h1.51
Drill Drawing:
  circle w0.254: c-3.4,109.374 r0.847
  lines w0.254: -4.246,93.287 -3.4,93.71 -2.553,93.287 -2.976,94.134 -2.553,94.98 -3.4,94.557 -4.246,94.98 -3.823,94.134 -4.246,93.287 ; -4.246,97.097 -2.553,97.097 -2.553,98.79 -4.246,98.79 -4.246,97.097 ; -4.246,101.33 -3.823,101.33 -3.4,100.907 -2.976,101.33 -2.553,101.33 -2.976,101.754 -2.553,102.177 -2.976,102.177 -3.4,102.6 -3.823,102.177 -4.246,102.177 -3.823,101.754 -4.246,101.33 ; -4.246,105.14 -3.823,105.14 -3.823,104.717 -2.976,104.717 -2.976,105.14 -2.553,105.14 -2.553,105.987 -2.976,105.987 -2.976,106.41 -3.823,106.41 -3.823,105.987 -4.246,105.987 -4.246,105.14 ; -4.246,114.03 -2.553,114.03 -3.4,112.337 -4.246,114.03
  lines w0.381: -5.765,92.144 353.441,92.144 ; -5.765,115.004 353.441,115.004 ; 8.227,88.334 8.227,118.814 ; 23.209,88.334 23.209,118.814 ; 52.411,88.334 52.411,118.814 ; 65.26,88.334 65.26,118.814 ; 83.899,88.334 83.899,118.814 ; 121.987,88.334 121.987,118.814 ; 136.969,88.334 136.969,118.814 ; 164.647,88.334 164.647,118.814 ; 201.212,88.334 201.212,118.814 ; 222.898,88.334 222.898,118.814 ; 256.772,88.334 256.772,118.814 ; 290.645,88.334 290.645,118.814 ; 317.815,88.334 317.815,118.814 ; -5.765,88.334 353.441,88.334 353.441,118.814 -5.765,118.814 -5.765,88.334
  text "Symbol" at -3.479,116.147 h1.83
  text "Count" at 9.37,116.147 h1.83
  text "Hole Size" at 24.352,116.147 h1.83
  text "Plated" at 53.554,116.147 h1.83
  text "Hole Type" at 66.403,116.147 h1.83
  text "Drill Layer Pair" at 85.042,116.147 h1.83
  text "Via/Pad" at 123.13,116.147 h1.83
  text "Pad Shape" at 138.112,116.147 h1.83
  text "Template" at 165.79,116.147 h1.83
  text "Description" at 202.355,116.147 h1.83
  text "Hole Tolerance (+)" at 224.041,116.147 h1.83
  text "Hole Tolerance (-)" at 257.915,116.147 h1.83
  text "Hole Length" at 291.788,116.147 h1.83
  text "Routed Path Length" at 318.958,116.147 h1.83
  text "2" at 9.37,112.337 h1.52
  text "0.600mm (23.62mil)" at 24.352,112.337 h1.52
  text "PTH" at 53.554,112.337 h1.52
  text "Slot" at 66.403,112.337 h1.52
  text "Top Layer - Bottom Layer" at 85.042,112.337 h1.52
  text "Pad" at 123.13,112.337 h1.52
  text "Rounded Rectangle" at 138.112,112.337 h1.52
  text "s-100h60_130r50" at 165.79,112.337 h1.52
  text "1.300mm (51.18mil)" at 291.788,112.337 h1.52
  text "0.700mm (27.56mil)" at 318.958,112.337 h1.52
  text "2" at 9.37,108.527 h1.52
  text "0.850mm (33.47mil)" at 24.352,108.527 h1.52
  text "PTH" at 53.554,108.527 h1.52
  text "Round" at 66.403,108.527 h1.52
  text "Top Layer - Bottom Layer" at 85.042,108.527 h1.52
  text "Pad" at 123.13,108.527 h1.52
  text "Rounded" at 138.112,108.527 h1.52
  text "c145h85" at 165.79,108.527 h1.52
  text "-" at 291.788,108.527 h1.52
  text "-" at 318.958,108.527 h1.52
  text "4" at 9.37,104.717 h1.52
  text "3.200mm (125.98mil)" at 24.352,104.717 h1.52
  text "PTH" at 53.554,104.717 h1.52
  text "Round" at 66.403,104.717 h1.52
  text "Top Layer - Bottom Layer" at 85.042,104.717 h1.52
  text "Via" at 123.13,104.717 h1.52
  text "Rounded" at 138.112,104.717 h1.52
  text "v600h320m610_2670034071" at 165.79,104.717 h1.52
  text "-" at 291.788,104.717 h1.52
  text "-" at 318.958,104.717 h1.52
  text "5" at 9.37,100.907 h1.52
  text "0.700mm (27.56mil)" at 24.352,100.907 h1.52
  text "PTH" at 53.554,100.907 h1.52
  text "Round" at 66.403,100.907 h1.52
  text "Top Layer - Bottom Layer" at 85.042,100.907 h1.52
  text "Pad" at 123.13,100.907 h1.52
  text "(Mixed)" at 138.112,100.907 h1.52
  text "(Mixed)" at 165.79,100.907 h1.52
  text "-" at 291.788,100.907 h1.52
  text "-" at 318.958,100.907 h1.52
  text "16" at 9.37,97.097 h1.52
  text "0.900mm (35.43mil)" at 24.352,97.097 h1.52
  text "PTH" at 53.554,97.097 h1.52
  text "Round" at 66.403,97.097 h1.52
  text "Top Layer - Bottom Layer" at 85.042,97.097 h1.52
  text "Pad" at 123.13,97.097 h1.52
  text "(Mixed)" at 138.112,97.097 h1.52
  text "(Mixed)" at 165.79,97.097 h1.52
  text "-" at 291.788,97.097 h1.52
  text "-" at 318.958,97.097 h1.52
  text "135" at 9.37,93.287 h1.52
  text "0.400mm (15.75mil)" at 24.352,93.287 h1.52
  text "PTH" at 53.554,93.287 h1.52
  text "Round" at 66.403,93.287 h1.52
  text "Top Layer - Bottom Layer" at 85.042,93.287 h1.52
  text "Via" at 123.13,93.287 h1.52
  text "Rounded" at 138.112,93.287 h1.52
  text "(Mixed)" at 165.79,93.287 h1.52
  text "-" at 291.788,93.287 h1.52
  text "-" at 318.958,93.287 h1.52
  text "164 Total" at 9.37,89.477 h1.52
  text "Slot definitions :" at -3.479,85.795 h1.52
  text "Routed Path Length" at 22.751,85.795 h1.52
  text "= Calculated from tool start centre position to tool end centre position." at 50.759,85.795 h1.52
  text "Hole Length" at 22.751,83.255 h1.52
  text "= Routed Path Length + Tool Size = Slot length as defined in the PCB layout" at 40.348,83.255 h1.52

## Dimensions
0,0 to 1,5 on Mechanical 13
0,63 to 2,56 on Mechanical 13
0,59 to 7,62 on Mechanical 13
123,63 to 111,56 on Mechanical 13
125,61 to 118,52 on Mechanical 13
0,0 to 0,63 on Mechanical 13
0,0 to 125,0 on Mechanical 13
2,63 to 10,60 on Mechanical 13
2,0 to 2.5,3 on Mechanical 13
0,2 to 3,2.5 on Mechanical 13

## Text inside footprints (layer, text, board x,y; h text height)
J1: Mechanical 1 "PCB EDGE" at 75.185,63.041 h0.3 r180